# EAGLE board mach di day 1-7 (EAGLE 6.1)
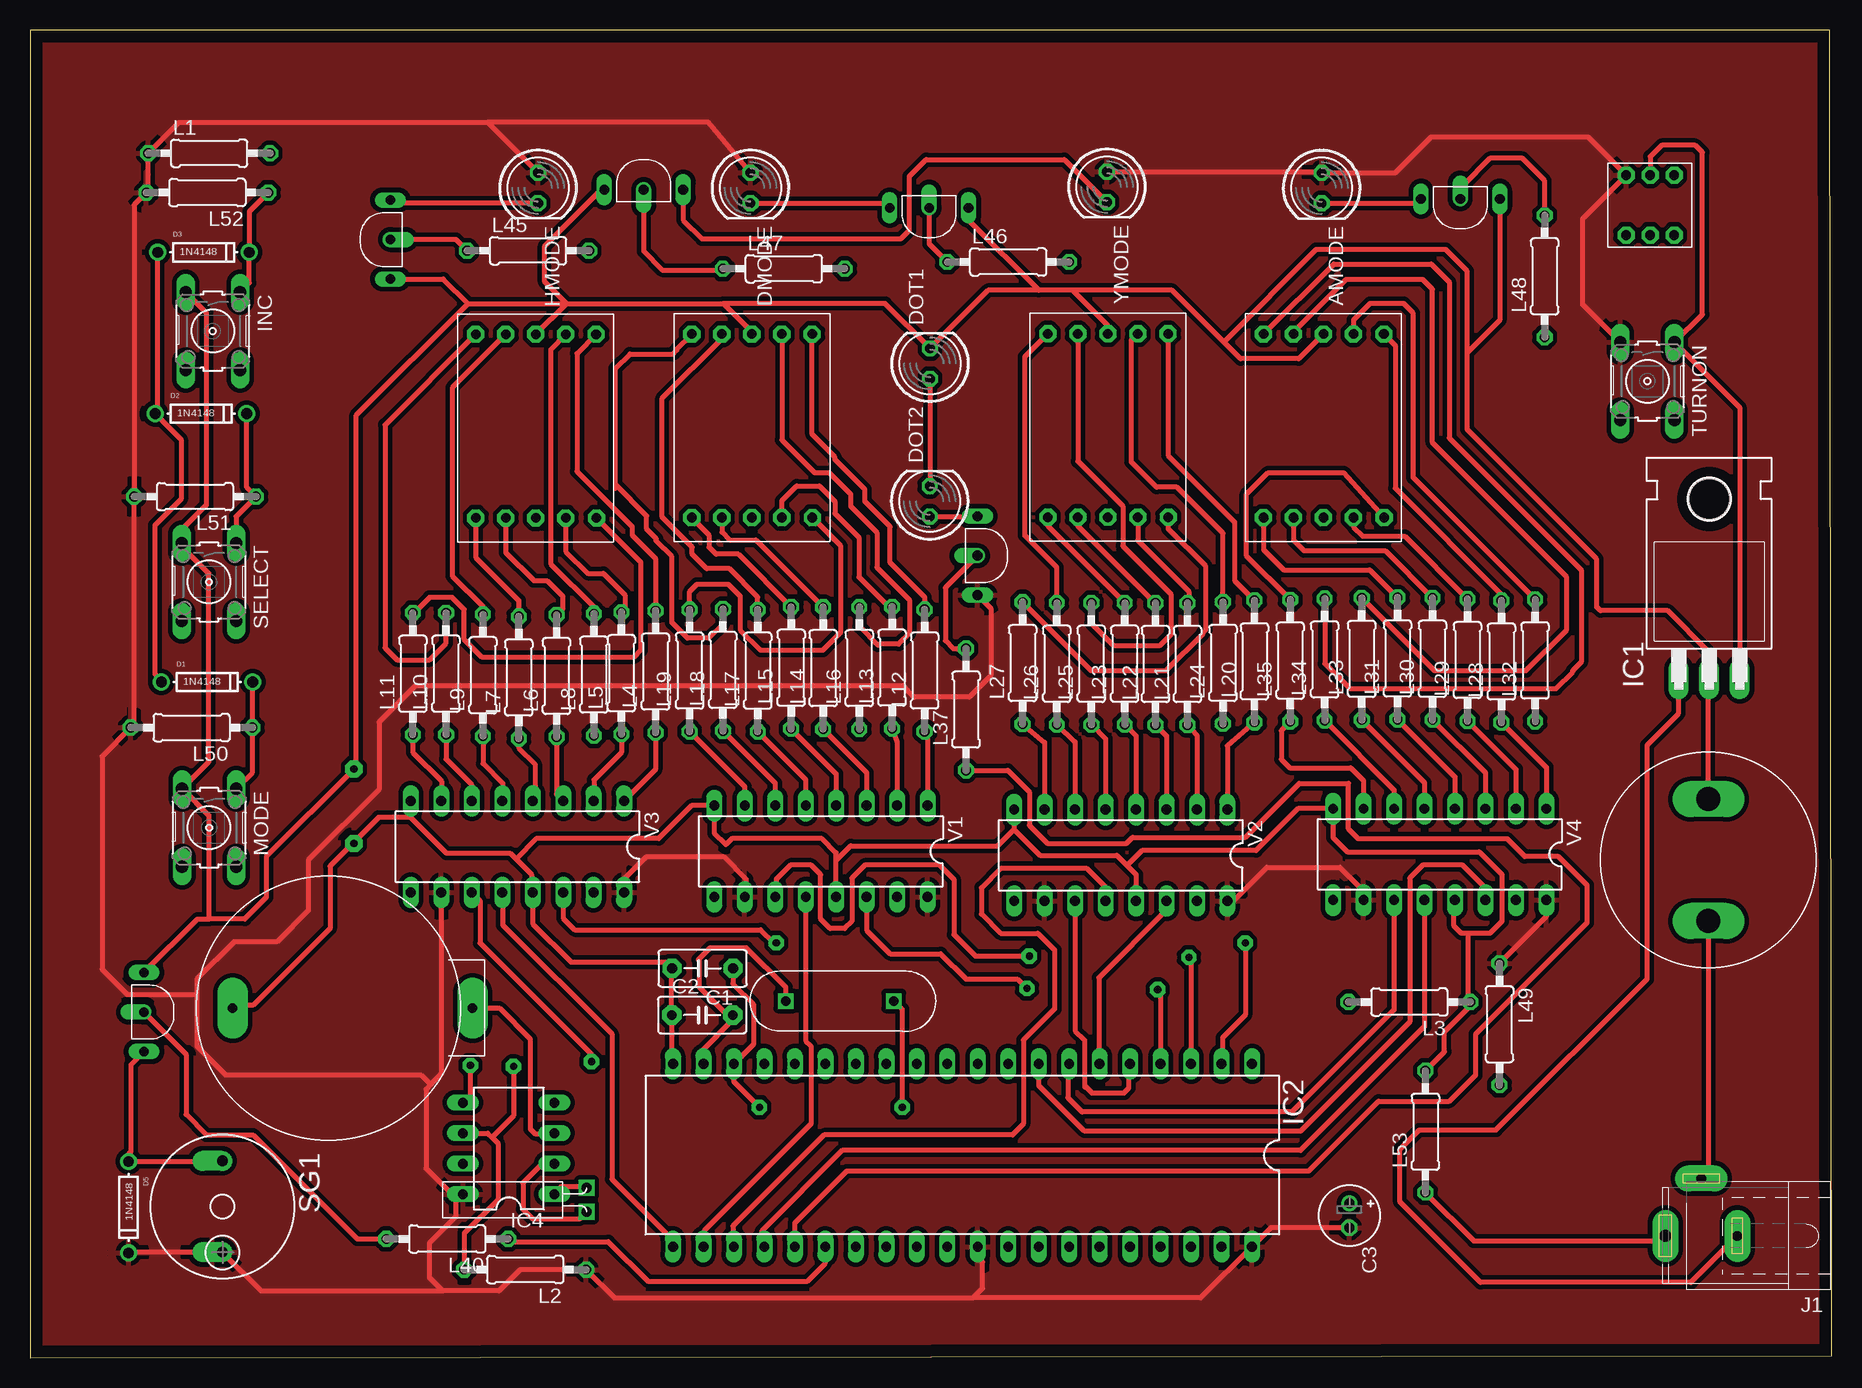
[diagram p0: board, top side]
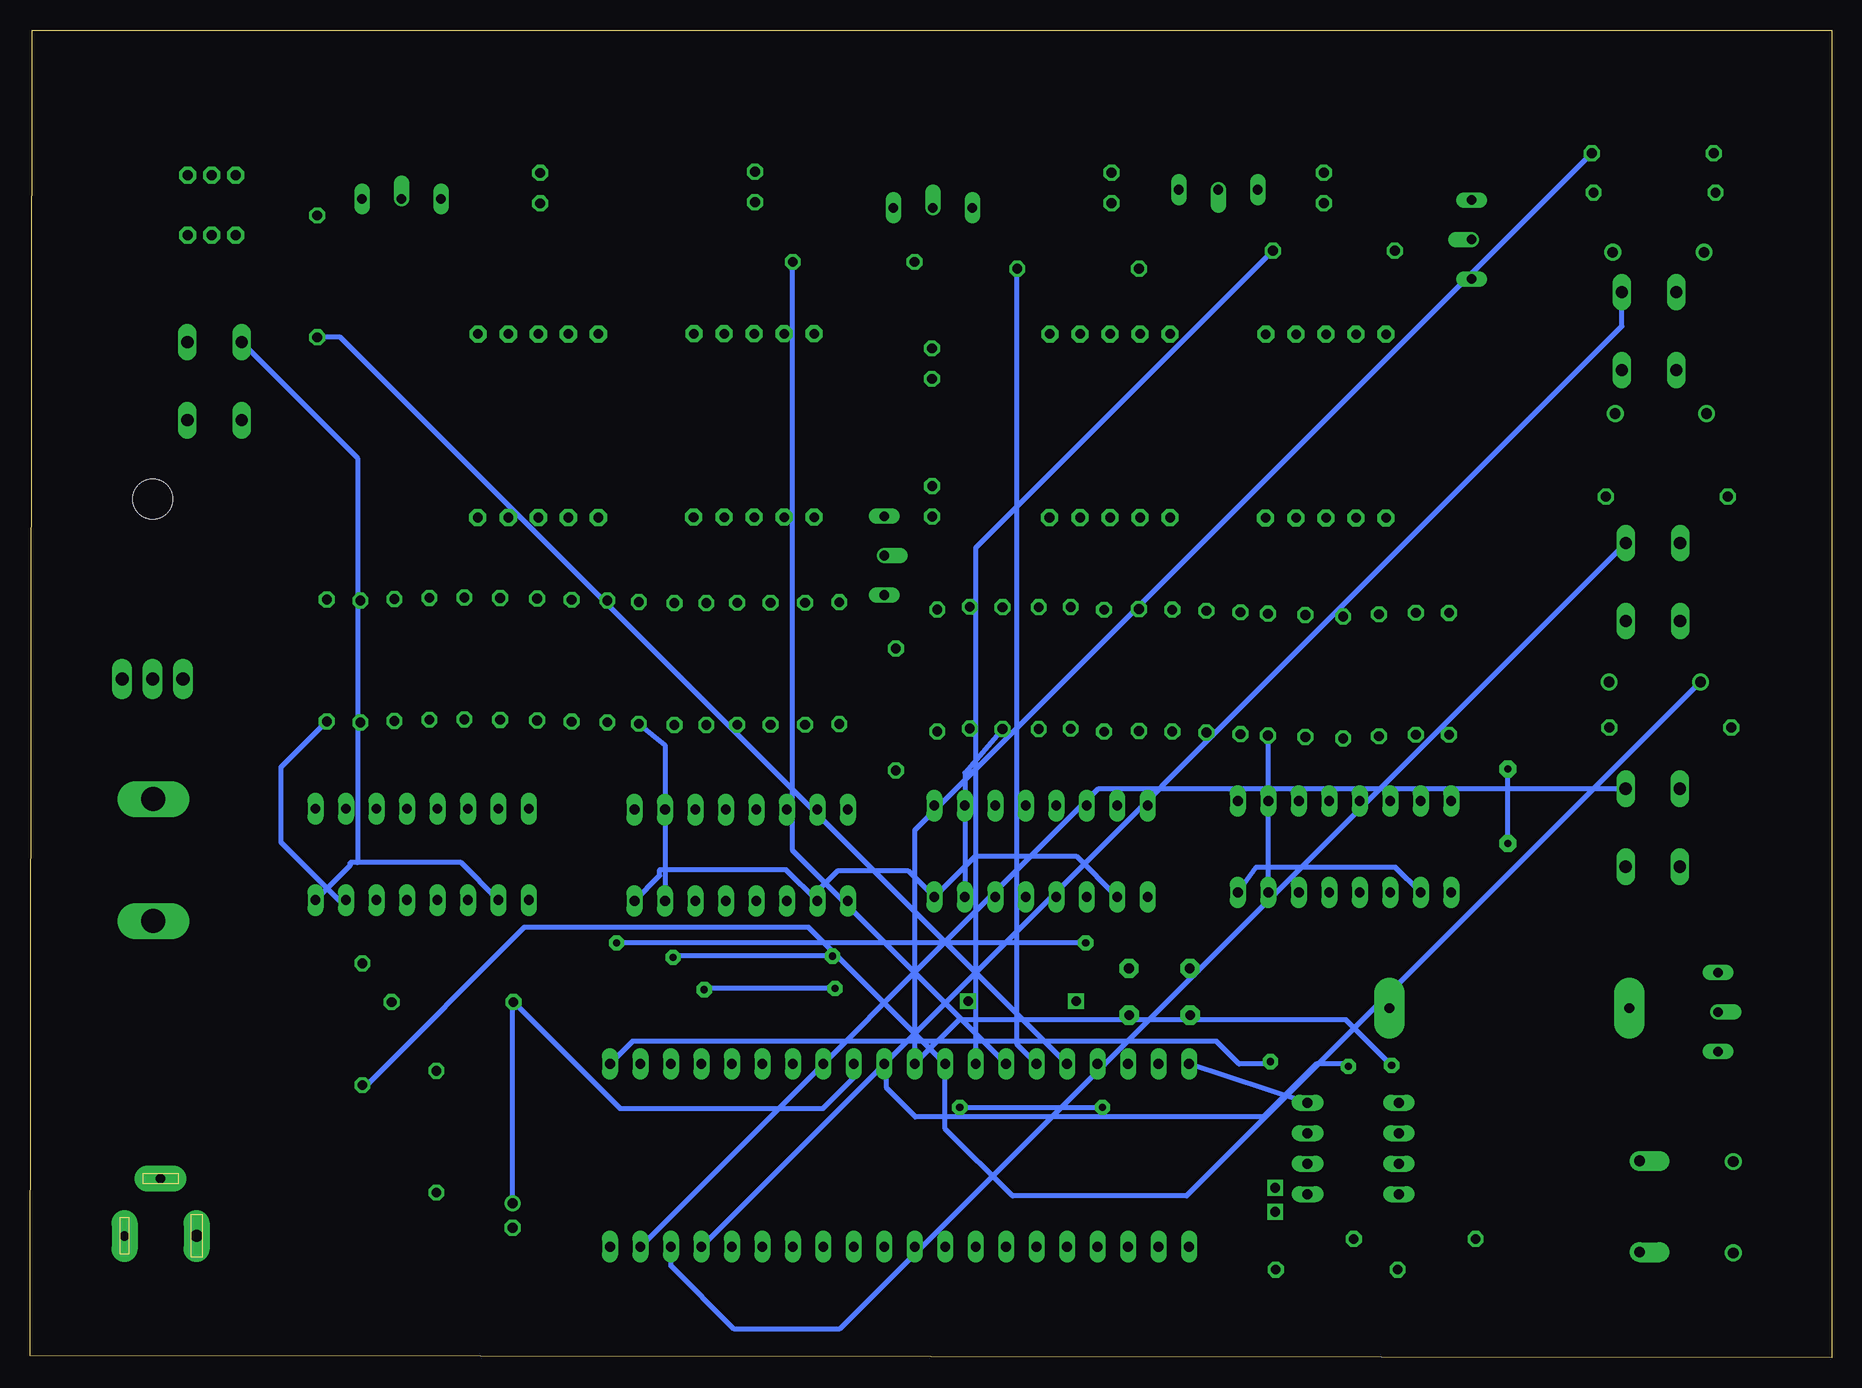
[diagram p1: board, bottom side, seen from below]

Size 150.2 x 110.71 mm. Coordinates in mm from the lower left corner, seen from the top.
Outline: 0,0 150.2,0.2 150.01,110.69 0,110.71 0,0
Copper layers (1*16): Top 0.035mm / dielectric 1.5mm / Bottom 0.035mm
Design rules: minimum track width 11mil, minimum drill 20mil, track to track 15mil, track to pad 15mil, pad to pad 15mil, via to via 15mil, smd to smd 8mil, copper to edge 40mil, drill to drill 8mil, minimum pad ring 10mil, minimum via ring 8mil, stop-mask expansion 10mil, vias tented up to drill 0mil, thermal gap 40mil

## Footprints (pad centres in the part's own frame; a part is rotated, then mirrored left to right if it is on the bottom)
7SEG13X19 = drill 0.8 pad 1.422 octagon: P$1 5.175,7.19; P$2 2.65,7.19; P$3 0.15,7.19; P$4 -2.35,7.19; P$5 -4.85,7.19; P$6 5.201,-8.11; P$7 2.65,-8.11; P$8 0.15,-8.11; P$9 -2.35,-8.11; P$10 -4.85,-8.11
LED5MM = drill 0.813 octagon: A -1.27,0; K 1.27,0
C5B3 = drill 0.813 pad 1.6 octagon: 1 -2.54,0; 2 2.54,0
E2-5 = drill 0.813 pad 1.27: + -1.016,0 | drill 0.813 pad 1.27 octagon: - 1.016,0
DO-1N4148 = drill 0.9: A -3.81,0; C 3.81,0
TO220H = drill 1.118 long: 1 -2.54,-10.16; 2 0,-10.16; 3 2.54,-10.16 | hole 3.302: 0,4.826
DIL40 = drill 0.813 long: 1 -24.13,-7.62; 2 -21.59,-7.62; 3 -19.05,-7.62; 4 -16.51,-7.62; 5 -13.97,-7.62; 6 -11.43,-7.62; 7 -8.89,-7.62; 8 -6.35,-7.62; 9 -3.81,-7.62; 10 -1.27,-7.62; 11 1.27,-7.62; 12 3.81,-7.62; 13 6.35,-7.62; 14 8.89,-7.62; 15 11.43,-7.62; 16 13.97,-7.62; 17 16.51,-7.62; 18 19.05,-7.62; 19 21.59,-7.62; 20 24.13,-7.62; 21 24.13,7.62; 22 21.59,7.62; 23 19.05,7.62; 24 16.51,7.62; 25 13.97,7.62; 26 11.43,7.62; 27 8.89,7.62; 28 6.35,7.62; 29 3.81,7.62; 30 1.27,7.62; 31 -1.27,7.62; 32 -3.81,7.62; 33 -6.35,7.62; 34 -8.89,7.62; 35 -11.43,7.62; 36 -13.97,7.62; 37 -16.51,7.62; 38 -19.05,7.62; 39 -21.59,7.62; 40 -24.13,7.62
DIL08 = drill 0.813 long: 1 -3.81,-3.81; 2 -1.27,-3.81; 3 1.27,-3.81; 4 3.81,-3.81; 5 3.81,3.81; 6 1.27,3.81; 7 -1.27,3.81; 8 -3.81,3.81
B3F-10XX = drill 1.016 long: 1 -3.251,2.261; 2 3.251,2.261; 3 -3.251,-2.261; 4 3.251,-2.261
SPC4077 = drill 0.8 pad 2.184 long: 1 -3,0; 2 0,-4.8 | drill 1 pad 2.184 long: 3 3,0
0207/10 = drill 0.813 octagon: 1 -5.08,0; 2 5.08,0
BMT1205XH7.5 = drill 0.9 pad 1.676 offset: + 3.8,0; - -3.8,0
PINCMOS3VCR23 = drill 0.8 pad 2.54 long: P$1 0,8; P$2 0,-12
XTAL32KHZMINI = drill 0.8 square: P$1 0.5,-12; P$2 2.5,-12
XTAL12MHZ = drill 0.8 square: P$1 9.5,-2.5; P$2 0.5,-2.5
PUSKLOCKBUTTON = drill 0.8 pad 1.422 octagon: P$1 5.04,0; P$2 3.04,0; P$3 1.04,0; P$4 1.04,-5; P$5 3.04,-5; P$6 5.04,-5
C9014 = drill 0.8 long: P$1 -1.04,1; P$3 5.54,1 | drill 0.8 offset: P$2 2.25,1
9VBATERYJACK = drill 2 long: P$1 -5.08,0; P$2 5.08,0
DIL16 = drill 0.813 long: 1 -8.89,-3.81; 2 -6.35,-3.81; 3 -3.81,-3.81; 4 -1.27,-3.81; 5 1.27,-3.81; 6 3.81,-3.81; 7 6.35,-3.81; 8 8.89,-3.81; 9 8.89,3.81; 10 6.35,3.81; 11 3.81,3.81; 12 1.27,3.81; 13 -1.27,3.81; 14 -3.81,3.81; 15 -6.35,3.81; 16 -8.89,3.81

## Placement (x,y rotation side)
7SEG1  7SEG13X19 common Katot  [7SEG13X19]  42.01,78.15 0 top
7SEG2  7SEG13X19 common Katot  [7SEG13X19]  60.02,78.17 0 top
7SEG3  7SEG13X19 common Katot  [7SEG13X19]  89.69,78.19 0 top
7SEG4  7SEG13X19 common Katot  [7SEG13X19]  107.68,78.17 0 top
AMODE  Blue  [LED5MM]  107.67,97.53 270 top
C1  33p  [C5B3]  56.06,32.48 180 top
C2  33p  [C5B3]  56.04,28.59 0 top
C3  10uF  [E2-5]  109.97,11.87 270 top
D1  1N4148  [DO-1N4148]  14.76,56.35 0 top
D2  1N4148  [DO-1N4148]  14.26,78.73 0 top
D3  1N4148  [DO-1N4148]  14.47,92.17 0 top
D5  1N4148  [DO-1N4148]  8.21,12.57 270 top
DMODE  Blue  [LED5MM]  60.05,97.54 270 top
DOT1  Red  [LED5MM]  75.02,82.9 90 top
DOT2  Red  [LED5MM]  75,71.42 90 top
HMODE  Blue  [LED5MM]  42.35,97.54 270 top
IC1  7805T  [TO220H]  139.97,66.77 0 top
IC2  AT89C51-12PC  [DIL40]  77.73,16.9 180 top
IC4  ds1307  [DIL08]  39.9,17.46 90 top
INC  button  [B3F-10XX]  15.24,85.61 270 top
J1  jack dc  [SPC4077]  139.31,10.17 180 top
L1  10K  [0207/10]  14.93,100.43 0 top
L2  10K  [0207/10]  41.28,7.37 180 top
L3  8k2  [0207/10]  114.98,29.67 180 top
L4  450  [0207/10]  52.14,57.22 90 top
L5  450  [0207/10]  49.3,57.09 90 top
L6  450  [0207/10]  43.89,56.86 90 top
L7  450  [0207/10]  40.75,56.72 90 top
L8  450  [0207/10]  47,56.97 90 top
L9  450  [0207/10]  37.75,56.91 90 top
L10  450  [0207/10]  34.68,57.04 90 top
L11  450  [0207/10]  31.92,57.04 90 top
L12  450  [0207/10]  74.57,57.31 90 top
L13  450  [0207/10]  71.87,57.55 90 top
L14  450  [0207/10]  66.12,57.51 90 top
L15  450  [0207/10]  63.45,57.53 90 top
L16  450  [0207/10]  69.13,57.51 90 top
L17  450  [0207/10]  60.67,57.3 90 top
L18  450  [0207/10]  57.76,57.36 90 top
L19  450  [0207/10]  54.98,57.3 90 top
L20  450  [0207/10]  102.07,58.07 90 top
L21  450  [0207/10]  96.48,57.85 90 top
L22  450  [0207/10]  93.82,57.85 90 top
L23  450  [0207/10]  91.25,57.87 90 top
L24  450  [0207/10]  99.45,57.95 90 top
L25  450  [0207/10]  88.47,57.87 90 top
L26  450  [0207/10]  85.59,57.87 90 top
L27  450  [0207/10]  82.74,57.93 90 top
L28  450  [0207/10]  122.65,58.05 90 top
L29  450  [0207/10]  119.83,58.18 90 top
L30  450  [0207/10]  116.91,58.29 90 top
L31  450  [0207/10]  113.99,58.31 90 top
L32  450  [0207/10]  125.46,58.15 90 top
L33  450  [0207/10]  111.01,58.28 90 top
L34  450  [0207/10]  107.92,58.23 90 top
L35  450  [0207/10]  105.05,58.13 90 top
L37  180K  [0207/10]  78.02,54.06 90 top
L40  220K  [0207/10]  34.78,9.92 180 top
L45  330K  [0207/10]  41.52,92.31 0 top
L46  330K  [0207/10]  81.54,91.37 0 top
L47  330K  [0207/10]  62.83,90.8 0 top
L48  330K  [0207/10]  126.26,90.17 90 top
L49  10K  [0207/10]  122.49,27.82 270 top
L50  10K  [0207/10]  13.47,52.55 180 top
L51  10K  [0207/10]  13.76,71.81 180 top
L52  10K  [0207/10]  14.79,97.15 180 top
L53  15  [0207/10]  116.32,18.86 90 top
MODE  button  [B3F-10XX]  14.93,44.21 270 top
SELECT  button  [B3F-10XX]  14.92,64.69 270 top
SG1  buzzer 5V  [BMT1205XH7.5]  16.04,12.62 270 top
TURNON  button  [B3F-10XX]  134.82,81.43 270 top
U$1  PINCMOS3VCR23  [PINCMOS3VCR23]  24.89,29.17 90 top
U$2  XTAL32KHZMINI  [XTAL32KHZMINI]  34.4,11.69 90 top
U$5  XTAL12MHZ  [XTAL12MHZ]  72.5,27.26 180 top
U$7  lock button down  [PUSKLOCKBUTTON]  132.01,98.61 0 top
U$8  C9014  [C9014]  8.5,31.09 270 top
U$9  C9014  [C9014]  77.19,96.89 180 top
U$10  C9014  [C9014]  31.04,90.99 90 top
U$11  C9014  [C9014]  48.9,96.4 0 top
U$12  C9014  [C9014]  121.48,97.63 180 top
U$13  C9014  [C9014]  77.98,69.14 270 top
U$14  9V  [9VBATERYJACK]  139.91,41.51 90 top
V1  74595N  [DIL16]  65.93,42.24 180 top
V2  74595N  [DIL16]  90.92,41.91 180 top
V3  74595N  [DIL16]  40.63,42.62 180 top
V4  74595N  [DIL16]  117.51,41.99 180 top
YMODE  Blue  [LED5MM]  89.77,97.62 270 top

## Library data of the parts
7SEG1-7SEG4 = 7seg13x19
AMODE DMODE DOT1 DOT2 HMODE YMODE = led
C1 C2 = capacitor-wima
C3 = rcl
D1-D3 D5 = microbuilder
IC1 = linear
IC2 = atmel
IC4 = ic-package
INC MODE SELECT TURNON = switch-omron
J1 = con-jack
L1-L35 L37 L40 L45-L53 = resistor
SG1 = buzzer
U$1 = PINCMOS3VCR23
U$2 = Xtal32khzmini
U$5 = xtal12mhz
U$7 = pushlockbutton
U$8-U$13 = C9014
U$14 = 9vbateryjack
V1-V4 = 74ttl-din

## Nets
GND: 7SEG1.P$3 7SEG2.P$3 7SEG3.P$3 7SEG4.P$3 C1.2 C2.1 DOT1.K IC1.2 IC2.20 IC4.4 INC.3 L3.1 L53.2 MODE.3 SELECT.3 U$1.P$1 U$8.P$1 U$9.P$1 U$10.P$1 U$11.P$1 U$12.P$1 U$14.P$2 V1.8 V1.13 V2.8 V2.13 V3.8 V3.13 V4.8 V4.13
N$1: IC2.11 IC4.5 L1.2
N$2: IC2.10 IC4.6 L2.2
N$3: IC4.1 U$2.P$2
N$4: C3.+ IC2.9 L3.2
N$5: IC4.3 U$1.P$2
N$6: IC4.2 U$2.P$1
N$7: C2.2 IC2.19 U$5.P$1
N$8: C1.1 IC2.18 U$5.P$2
N$9: D1.C IC2.39 L50.1 MODE.1
N$10: IC2.25 L37.1
N$11: IC2.1 V3.11
N$12: IC2.2 V3.14
N$13: IC2.3 V1.11
N$14: DOT2.A U$13.P$1
N$15: IC2.5 V2.11
N$16: 7SEG1.P$4 L9.2
N$17: IC2.6 V2.14
N$18: IC2.7 V4.11
N$19: IC2.8 V4.14
N$20: L4.1 V3.1
N$21: L8.1 V3.15
N$22: 7SEG1.P$10 L7.2
N$23: L9.1 V3.5
N$24: L10.1 V3.6
N$25: 7SEG1.P$1 L4.2
N$26: L11.1 V3.7
N$27: L6.1 V3.3
N$28: L7.1 V3.4
N$29: L5.1 V3.2
N$30: DOT1.A DOT2.K
N$32: 7SEG1.P$5 L10.2
N$33: IC2.4 V1.14
N$34: 7SEG1.P$6 L11.2
N$35: IC1.1 J1.1
N$36: 7SEG2.P$10 L15.2
N$37: L13.1 V1.2
N$38: L14.1 V1.3
N$39: L15.1 V1.4
N$41: L17.1 V1.5
N$42: 7SEG2.P$5 L18.2
N$43: L18.1 V1.6
N$44: L16.1 V1.15
N$45: 7SEG2.P$2 L16.2
N$47: 7SEG2.P$7 L13.2
N$48: 7SEG2.P$9 L14.2
N$51: 7SEG2.P$6 L19.2
N$53: L37.2 U$13.P$2
N$54: 7SEG3.P$10 L23.2
N$55: L27.1 V2.7
N$56: L25.1 V2.5
N$57: L26.1 V2.6
N$58: 7SEG3.P$6 L27.2
N$59: L23.1 V2.4
N$60: L21.1 V2.2
N$61: L20.1 V2.1
N$62: L24.1 V2.15
N$63: 7SEG3.P$2 L24.2
N$64: 7SEG3.P$1 L20.2
N$65: 7SEG3.P$7 L21.2
N$66: 7SEG3.P$9 L22.2
N$67: 7SEG3.P$4 L25.2
N$68: 7SEG3.P$5 L26.2
N$69: L22.1 V2.3
N$70: 7SEG4.P$10 L31.2
N$71: L35.1 V4.7
N$72: L33.1 V4.5
N$73: L34.1 V4.6
N$74: L30.1 V4.3
N$75: L31.1 V4.4
N$76: L29.1 V4.2
N$77: L28.1 V4.1
N$78: L32.1 V4.15
N$79: 7SEG4.P$2 L32.2
N$80: 7SEG4.P$1 L28.2
N$81: 7SEG4.P$7 L29.2
N$82: 7SEG4.P$9 L30.2
N$83: 7SEG4.P$4 L33.2
N$84: 7SEG4.P$5 L34.2
N$85: 7SEG4.P$6 L35.2
N$89: IC2.26 L40.1
N$90: L40.2 U$8.P$2
N$91: L45.1 U$10.P$2
N$92: L46.1 U$9.P$2
N$93: L47.1 U$11.P$2
N$94: HMODE.K U$10.P$3
N$95: D5.A SG1.- U$8.P$3
N$96: D3.C IC2.37 INC.1 L52.1
N$97: L48.2 U$12.P$2
N$98: AMODE.K U$12.P$3
N$99: U$11.P$3 YMODE.K
N$101: DMODE.K U$9.P$3
N$105: IC2.13 L45.2
N$106: D1.A D2.A D3.A IC2.12 L49.2
N$107: IC2.14 L46.2
N$108: IC2.15 L47.2
N$109: IC2.16 L48.1
N$110: IC2.21 V3.12
N$111: IC2.22 V1.12
N$112: IC2.23 V2.12
N$113: IC2.24 V4.12
N$115: J1.3 L53.1
N$117: D2.C IC2.38 L51.1 SELECT.1
N$118: J1.2 U$14.P$1
N$120: 7SEG1.P$2 L8.2
N$121: 7SEG1.P$9 L6.2
N$123: 7SEG2.P$4 L17.2
N$124: 7SEG1.P$7 L5.2
N$127: L19.1 V1.7
N$128: L12.1 V1.1
N$129: 7SEG2.P$1 L12.2
VCC: AMODE.A C3.- D5.C DMODE.A HMODE.A IC2.31 IC2.40 IC4.8 L1.1 L2.1 L49.1 L50.2 L51.2 L52.2 SG1.+ TURNON.3 U$7.P$3 U$13.P$3 V1.10 V1.16 V2.10 V2.16 V3.10 V3.16 V4.10 V4.16 YMODE.A
VCCOUT: IC1.3 TURNON.1 U$7.P$2

## Tracks (layer width: path | path; a pad name or v marks a point on that pad's centre or on a via)
GND  (via drill 0.6 pad 1.42)
  Top 0.406: V2.8 82.03,44.07 | 82.03,44.07 84.2,41.9 90.6,41.9 91.45,41.05 | 91.45,41.05 92.2,40.3 V2.13 | 91.45,41.05 92.7,42.3 102.2,42.3 105.7,45.8 V4.8 108.62,43.38 109.8,42.2 120.8,42.2 122.7,40.3 122.7,36.4 121.7,35.4 119.9,35.4 | 119.9,35.4 119.3,35.4 118.7,36 118.7,38.1 V4.13 | V3.8 31.74,45.06 | 31.74,45.06 34.7,42.1 40,42.1 40.5,41.6 | 40.5,41.6 41.8,40.3 41.8,38.91 V3.13 41.9,36.2 45.1,33 53,33 C1.2 53.5,32.45 C2.1 53.5,24.61 IC2.20 | 40.5,41.6 42.2,43.3 52.4,43.3 55.15,46.05 V1.8 57.04,43.76 58,42.8 58.5,43.3 66,43.3 67.2,42.1 67.2,41.5 | V1.13 67.2,41.5 | 67.2,41.5 68.4,42.7 80.66,42.7 82.03,44.07 | 31.74,45.06 29.06,45.06 27,43 | 27,43 25,41 25,35.8 18.6,29.4 17.12,29.4 U$1.P$1 | 7SEG1.P$3 44.73,87.9 | 44.73,87.9 57.8,87.9 | 7SEG2.P$3 60.17,85.53 57.8,87.9 | 57.8,87.9 71.29,87.9 DOT1.K 79.86,89 84.1,89 | 7SEG3.P$3 89.84,86.06 86.9,89 | 86.9,89 84.1,89 | 7SEG4.P$3 105.77,83.3 100.9,83.3 99.5,84.7 | 99.5,84.7 95.2,89 86.9,89 | 119.8,83.8 119.8,77.4 130.6,66.6 130.6,62.6 130.9,62.3 136.5,62.3 139.97,58.83 IC1.2 139.91,56.55 U$14.P$2 | 119.8,83.8 119.8,90.6 118,92.4 107.2,92.4 99.5,84.7 | U$8.P$1 13.97,36.6 14.9,36.6 | 36.5,87.9 27.2,78.6 27.2,49.3 v27,49.1 19.7,41.8 19.7,38.4 17.9,36.6 14.9,36.6 | 36.5,87.9 44.73,87.9 | L53.2 117.9,25.53 117.9,27.2 120.06,29.36 L3.1 119.9,29.83 119.9,35.4 | INC.3 14.7,87.14 14.7,71.1 12.66,69.06 SELECT.3 12.66,67.64 14.9,65.4 14.9,49.69 MODE.3 14.9,45.23 14.9,36.6 | 27,43 v27,42.9 | U$10.P$1 34.45,89.95 36.5,87.9 | 44.73,87.9 42.9,89.73 42.9,92.7 47.6,97.4 U$11.P$1 | U$9.P$1 78.23,94.87 84.1,89 | U$12.P$1 122.52,86.52 119.8,83.8
  Bottom 0.406: IC4.4 IC2.20 | v27,42.9 v27,49.1
N$1  (via drill 0.6 pad 1.27)
  Top 0.406: v36.7,24.4 36.7,21.88 IC4.5
  Bottom 0.406: v36.7,24.4 40.5,28.2 72.77,28.2 IC2.11 76.46,43.99 L1.2
N$2  (via drill 0.6 pad 1.27)
  Top 0.406: IC4.6 38.17,18.73 38.5,18.4 | 38.5,18.4 39,17.9 39,13.2 36.2,10.4 L2.2 | v40.3,24.3 40.3,20.2 38.5,18.4
  Bottom 0.406: v40.3,24.3 40.52,24.52 42.98,24.52 47.4,20.1 76.4,20.1 78.8,22.5 78.8,24.32 IC2.10
N$3
  Top 0.406: IC4.1 43.71,13.71 44.3,14.3 46.28,14.3 U$2.P$2
N$4
  Bottom 0.406: IC2.9 81.54,23.37 84.1,20.8 101.03,20.8 L3.2 109.97,29.61 C3.+
N$5
  Top 0.406: U$1.P$2 39.13,29.17 41.7,26.6 41.7,19.1 42.1,18.7 43.68,18.7 IC4.3
N$6
  Top 0.406: IC4.2 42.69,16.19 41.1,14.6 41.1,12.4 41.9,11.6 45.81,11.6 U$2.P$1
N$7
  Top 0.406: IC2.19 56,24.65 56,25.6 58.58,28.18 C2.2 58.11,28.59 55.8,30.9 55.8,33.1 55.7,33.2 56.7,34.2 59.7,34.2 63,30.9 U$5.P$1
N$8  (via drill 0.6 pad 1.27)
  Top 0.406: C1.1 58.6,31.2 60.3,29.5 60.3,26.14 IC2.18 58.68,23.03 v60.8,20.9 | U$5.P$2 72.7,29.06 v72.7,20.9
  Bottom 0.406: v72.7,20.9 v60.8,20.9
N$9
  Top 0.406: MODE.1 18.55,48.81 L50.1 18.57,52.58 D1.C
  Bottom 0.406: IC2.39 61.14,47.46 MODE.1
N$10
  Top 0.406: IC2.25 63.76,11.25 68.1,15.6 106.6,15.6 112.4,21.4 118.3,21.4 120.5,23.6 120.5,27 129.8,36.3 129.8,39.4 127.4,41.8 124.6,41.8 123.1,43.3 110.7,43.3 109.9,44.1 109.9,47.9 105.8,47.9 101.3,43.4 91.9,43.4 91.4,42.9 84.8,42.9 83.3,44.4 83.3,47.2 81.52,48.98 L37.1
N$11  (via drill 0.6 pad 1.27)
  Top 0.406: V3.11 37.5,38.13 37.5,34.6 46.8,25.3 v46.8,24.7
  Bottom 0.406: v46.8,24.7 46.98,24.52 49.42,24.52 51.3,26.4 99.97,26.4 IC2.1
N$12  (via drill 0.6 pad 1.27)
  Top 0.406: V3.14 44.44,36.66 45.4,35.7 60.9,35.7 62,34.6 v62.2,34.6 62.1,34.7 | v101.3,34.6 101.3,28.6 99.4,26.7 99.4,24.6 IC2.2
  Bottom 0.406: v62.2,34.6 v101.3,34.6
N$13  (via drill 0.6 pad 1.27)
  Top 0.406: 83.4,33.5 v83.3,33.5 78.8,33.5 77,35.3 77,39.9 75.8,41.1 69.6,41.1 68.5,40 68.5,36.4 67.9,35.8 66.7,35.8 65.9,36.6 65.9,40.3 65.1,41.1 63.4,41.1 62.2,39.9 62.2,38.52 V1.11 | v96.6,33.4 96.78,33.4 IC2.3
  Bottom 0.406: v83.3,33.5 96.6,33.5 v96.6,33.4
N$14
  Top 0.406: DOT2.A 78.95,70.14 U$13.P$1
N$15
  Top 0.406: V2.11 87.11,27.29 87.9,26.5 87.9,22.6 88,22.6 88.5,22.1 91.2,22.1 91.6,22.5 91.6,24.42 IC2.5
N$16
  Top 0.406: 7SEG1.P$4 35.2,80.87 35.2,65.2 37.75,62.65 L9.2
N$17
  Top 0.406: IC2.6 89.1,24.57 89.1,31.7 94.73,37.33 V2.14
N$18
  Top 0.406: V4.11 113.7,29 105.2,20.5 87.7,20.5 86.5,21.7 86.5,24.4 IC2.7
N$19
  Top 0.406: V4.14 121.32,39.18 119.4,41.1 116.1,41.1 115,40 115,28 105.9,18.9 87.9,18.9 84.1,22.7 84.1,24.49 IC2.8
N$20
  Top 0.406: L4.1 52.14,49.05 V3.1
N$21
  Bottom 0.406: L8.1 47,38.83 V3.15
N$22
  Top 0.406: 7SEG1.P$10 37.16,66.74 40.75,63.15 L7.2
N$23
  Top 0.406: L9.1 37.75,49.55 39.4,47.9 39.4,46.47 V3.5
N$24
  Top 0.406: L10.1 34.68,49.92 36.8,47.8 36.8,46.45 V3.6
N$25
  Top 0.406: 7SEG1.P$1 45.6,83.75 45.6,73.9 50.2,69.3 50.2,68.6 52.14,66.66 L4.2
N$26
  Top 0.406: L11.1 31.92,50.48 34.3,48.1 34.3,46.45 V3.7
N$27
  Top 0.406: L6.1 43.89,46.98 V3.3
N$28
  Top 0.406: L7.1 40.75,50.85 42.1,49.5 42.1,46.63 V3.4
N$29
  Top 0.406: L5.1 49.3,50.5 47,48.2 47,46.45 V3.2
N$30
  Top 0.406: DOT1.A 75.02,72.71 DOT2.K
N$31
  pour Top: 6.72,104.99 150.21,104.99 150.21,0.19 6.72,0.19
N$32
  Top 0.406: 7SEG1.P$5 29.6,77.77 29.6,59.2 30.6,58.2 33.3,58.2 34.68,59.58 L10.2
N$33  (via drill 0.6 pad 1.27)
  Top 0.406: v94,30.7 94.24,30.46 IC2.4 | V1.14 69.74,35.66 71.7,33.7 75.9,33.7 78,31.6 82.3,31.6 v83.1,30.8
  Bottom 0.406: v83.1,30.8 93.9,30.8 v94,30.7
N$34
  Top 0.406: 7SEG1.P$6 50.9,66.35 50.9,59 50.3,58.4 37.7,58.4 36.2,59.9 36.2,62.4 35.2,63.4 33.3,63.4 32.02,62.12 L11.2
N$35
  Top 0.406: IC1.1 137.43,53.73 134.8,51.1 134.8,31.6 122.2,19 115.8,19 114.2,17.4 114.2,13 120.9,6.3 138.45,6.3 J1.1
N$36
  Top 0.406: L15.2 59.06,67 57.2,67 56.6,67.6 56.6,68.6 55.17,70.03 7SEG2.P$10
N$37
  Top 0.406: L13.1 72.28,51.36 V1.2
N$38
  Top 0.406: L14.1 69.74,48.81 V1.3
N$39
  Top 0.406: L15.1 67.2,48.7 V1.4
N$41
  Top 0.406: L17.1 64.66,48.22 V1.5
N$42
  Top 0.406: L18.2 57.76,61.16 56.6,60 54.8,60 53.5,61.3 53.5,66.8 52.2,68.1 52.2,68.3 51.4,69.1 51.4,70.2 48.8,72.8 | 7SEG2.P$5 53.9,84.09 53.9,84 53.6,83.7 50,83.7 48.8,82.5 48.8,72.8 | 48.8,72.5 48.8,72.8
N$43
  Top 0.406: L18.1 62.12,47.92 V1.6
N$44
  Bottom 0.406: L16.1 72.28,48.78 V1.15
N$45
  Top 0.406: L16.2 69.13,60.97 70.7,59.4 70.8,59.5 72.4,59.5 73.3,60.4 73.3,63.2 70.6,65.9 70.6,68.8 68.4,71 68.4,72 66.6,73.8 65.4,73.8 62.67,76.53 7SEG2.P$2
N$47
  Top 0.406: 7SEG2.P$7 62.67,71.47 63.9,72.7 65.8,72.7 67.1,71.4 67.1,70.4 69.1,68.4 69.1,65.1 71.57,62.63 L13.2
N$48
  Top 0.406: 7SEG2.P$9 57.67,68.83 58.3,68.2 60.51,68.2 L14.2
N$51
  Top 0.406: L19.2 54.98,63.88 55.6,64.5 58.2,64.5 59.2,63.5 59.2,60.7 60.9,59 66.1,59 67.6,60.5 67.6,67.68 7SEG2.P$6
N$53
  Top 0.406: U$13.P$2 76.3,64.21 76.3,59.8 76.96,59.14 L37.2
N$54
  Top 0.406: 7SEG3.P$10 84.84,69.37 L23.2
N$55
  Top 0.406: L27.1 84.57,51.32 V2.7
N$56
  Top 0.406: L25.1 89.65,51.61 V2.5
N$57
  Top 0.406: L26.1 87.11,51.37 V2.6
N$58
  Top 0.406: L27.2 88.45,57.3 94.7,57.3 97.8,60.4 97.8,60.5 98,60.7 98,66 94.89,69.11 7SEG3.P$6
N$59
  Top 0.406: L23.1 92.19,51.85 V2.4
N$60
  Top 0.406: L21.1 97.27,51.88 V2.2
N$61
  Top 0.406: L20.1 99.81,51.03 V2.1
N$62
  Bottom 0.406: L24.1 97.27,51.09 V2.15
N$63
  Top 0.406: L24.2 99.45,68.75 95.6,72.6 93.9,72.6 91.8,74.7 91.8,84.85 7SEG3.P$2
N$64
  Top 0.406: 7SEG3.P$1 94.86,75.24 100.4,69.7 100.4,64.82 L20.2
N$65
  Top 0.406: 7SEG3.P$7 92.34,68.16 96.6,63.9 96.6,63.05 L21.2
N$66
  Top 0.406: 7SEG3.P$9 87.34,69.36 93.77,62.93 L22.2
N$67
  Top 0.406: L25.2 88.47,61.23 90.3,59.4 94.2,59.4 95.2,60.4 95.1,60.5 95.1,63.7 91.1,67.7 91.1,71 87.34,74.76 7SEG3.P$4
N$68
  Top 0.406: L26.2 85.59,65.91 82.9,68.6 82.9,83.45 7SEG3.P$5
N$69
  Top 0.406: L22.1 94.73,51.86 V2.3
N$70
  Top 0.406: 7SEG4.P$10 102.83,67.37 104.5,65.7 111.69,65.7 L31.2
N$71
  Top 0.406: L35.1 104.3,52.3 104.3,49.9 105,49.2 110.1,49.2 111.16,48.14 V4.7
N$72
  Top 0.406: L33.1 116.24,47.97 V4.5
N$73
  Top 0.406: L34.1 113.7,47.37 V4.6
N$74
  Top 0.406: L30.1 121.32,48.8 V4.3
N$75
  Top 0.406: L31.1 118.78,48.45 V4.4
N$76
  Top 0.406: L29.1 123.86,49.07 V4.2
N$77
  Top 0.406: L28.1 126.4,49.23 V4.1
N$78
  Bottom 0.406: L32.1 129.3,49.23 129.3,43 124.48,38.18 V4.15
N$79
  Top 0.406: L32.2 115.3,73.39 115.3,87.1 114.5,87.9 111.7,87.9 110.33,86.53 7SEG4.P$2
N$80
  Top 0.406: 7SEG4.P$1 113.8,84.41 113.8,72.5 122.65,63.65 L28.2
N$81
  Top 0.406: 7SEG4.P$7 110.33,69.27 111.1,68.5 114.59,68.5 L29.2
N$82
  Top 0.406: 7SEG4.P$9 105.33,68.17 106.2,67.3 112.98,67.3 L30.2
N$83
  Top 0.406: L33.2 117.07,57.3 124.7,57.3 128.1,60.7 128.1,65.1 116.9,76.3 116.9,89.1 116.1,89.9 109.7,89.9 105.33,85.53 7SEG4.P$4
N$84
  Top 0.406: L34.2 107.92,57.88 110,55.8 127.2,55.8 128.6,57.2 128.6,57.3 129.3,58 129.3,65.7 118.3,76.7 118.3,89.7 116.8,91.2 108.67,91.2 7SEG4.P$5
N$85
  Top 0.406: L35.2 101.4,66.86 101.4,72 103.2,73.8 109.5,73.8 7SEG4.P$6
N$89
  Top 0.406: L40.1 40.08,9.7 48.2,9.7 51.5,6.4 64.8,6.4 66.3,7.89 IC2.26
N$90
  Top 0.406: U$8.P$2 13,25.33 13,20.3 14.7,18.6 18.6,18.6 27.28,9.92 L40.2
N$91
  Top 0.406: L45.1 35.51,93.24 U$10.P$2
N$92
  Top 0.406: U$9.P$2 74.94,92.89 L46.1
N$93
  Top 0.406: U$11.P$2 51.15,92.25 52.7,90.7 57.65,90.7 L47.1
N$94
  Top 0.406: HMODE.K 30.29,96.27 U$10.P$3
N$95
  Top 0.406: SG1.- 15.99,16.38 D5.A 8.21,17.01 8.4,17.2 8.4,24.45 U$8.P$3
N$96
  Top 0.406: L52.1 18.28,95.56 D3.C 18.28,89.63 INC.1
  Bottom 0.406: IC2.37 17.5,86.01 INC.1
N$97
  Top 0.406: L48.2 126.26,98.14 124.4,100 121.7,100 119.4,97.7 119.4,96.8 U$12.P$2
N$98
  Top 0.406: AMODE.K 115.56,96.26 U$12.P$3
N$99
  Top 0.406: U$11.P$3 54.44,94.86 56,93.3 72.6,93.3 73.3,94 73.3,98.5 74.7,99.9 86.23,99.9 YMODE.K
N$101
  Top 0.406: DMODE.K 71.27,96.27 U$9.P$3
N$105
  Bottom 0.406: L45.2 71.38,67.53 IC2.13
N$106
  Top 0.406: D1.A 10.95,56.45 10.4,57 10.4,69.4 12.6,71.6 12.6,76.57 D2.A 10.66,78.93 D3.A
  Bottom 0.406: D1.A 53.8,13.5 68.3,13.5 73.92,19.11 IC2.12 85.3,35.9 109,35.9 122.16,22.74 L49.2
N$107
  Bottom 0.406: IC2.14 86.62,42.3 L46.2
N$108
  Bottom 0.406: IC2.15 67.91,26.13 L47.2
N$109
  Bottom 0.406: IC2.16 124.33,85.09 L48.1
N$110
  Top 0.406: V3.12 39.4,38.77 39.4,36.1 48.5,27 48.5,14.9 53.6,9.8 IC2.21
N$111
  Top 0.406: V1.12 64.66,26.44 65.1,26 65.1,19.5 56.2,10.6 56.2,9.34 IC2.22
N$112
  Top 0.406: V2.12 89.65,39.25 88.1,40.8 80.9,40.8 79.3,39.2 79.3,37 80.9,35.4 84,35.4 85.4,34 85.4,29.1 82.8,26.5 82.8,19.5 81.9,18.6 66.2,18.6 58.6,11 58.6,9.35 IC2.23
N$113
  Top 0.406: V4.12 116.24,27.64 105.9,17.3 67.7,17.3 61,10.6 61,9.49 IC2.24
N$115
  Top 0.406: L53.1 120.34,9.77 135.91,9.77 J1.3
N$117
  Top 0.406: D2.C 18.07,72.58 L51.1 17.18,70.15 SELECT.1
  Bottom 0.406: SELECT.1 82.72,2.4 91.5,2.4 96.78,7.67 IC2.38
N$118
  Top 0.406: U$14.P$1 139.91,15.57 J1.2
N$120
  Top 0.406: 7SEG1.P$2 43.4,84.07 43.4,66.2 47,62.6 L8.2
N$121
  Top 0.406: 7SEG1.P$9 39.66,67.14 42,64.8 43.1,64.8 44.4,63.5 44.4,62.45 L6.2
N$123
  Top 0.406: L17.2 60.67,63.43 58.3,65.8 56.4,65.8 55.2,67 55.2,67.6 52.7,70.1 52.7,80 57.67,84.97 7SEG2.P$4
N$124
  Top 0.406: 7SEG1.P$7 44.66,67.24 46.5,65.4 47.8,65.4 49.6,63.6 49.6,62.47 L5.2
N$127
  Top 0.406: L19.1 59.58,47.63 V1.7
N$128
  Top 0.406: L12.1 74.82,51.58 V1.1
N$129
  Top 0.406: L12.2 74.6,62.41 74.6,63.4 71.7,66.3 71.7,69.3 69.6,71.4 69.6,72.4 67.1,74.9 67.1,75.1 65.2,77 7SEG2.P$1
VCC
  Top 0.406: V3.10 34.28,23.68 33.4,22.8 | 33.4,22.8 33,22.4 33,15.8 35.3,13.5 35.94,13.5 IC4.8 35.5,13.06 35.5,11.8 33.3,9.6 33.3,6.7 34.4,5.6 | V2.16 100.3,38.1 103.1,40.9 109.2,40.9 111.16,38.94 V4.10 | 78.6,5 48.72,5 L2.1 40.87,7.37 39.1,5.6 34.4,5.6 | 78.6,5 79.4,5.8 79.4,8 79,8.4 IC2.31 | V3.16 49.52,39.92 51.4,41.8 57.8,41.8 59.7,39.9 59.7,38.55 V1.10 | 13.9,30.3 13.9,31.6 17,34.7 20.6,34.7 23.2,37.3 23.2,41.5 29.1,47.4 29.1,53 32.1,56 72.8,56 73.7,55.1 78.3,55.1 80.1,56.9 80.1,62.48 U$13.P$3 | 13.9,30.3 13.9,26 16.3,23.6 32.6,23.6 33.4,22.8 | D5.C 8.28,8.82 SG1.+ 19.26,5.6 34.4,5.6 | L49.1 126.4,36.81 V4.16 | TURNON.3 129.4,87.84 129.4,94.95 U$7.P$3 129.86,101.8 116.8,101.8 113.8,98.8 AMODE.A 107.58,98.89 YMODE.A | 13.9,30.3 8.1,30.3 6,32.4 6,50.16 L50.2 8.68,52.84 L51.2 8.68,96.12 L52.2 9.85,97.3 L1.1 12.42,103 38.16,103 | HMODE.A 38.16,103 | 78.6,5 97.58,5 IC2.40 103.43,10.85 C3.- | DMODE.A 56.56,103 38.16,103
  Bottom 0.406: V3.10 36.37,40.9 48,40.9 V3.16 | V1.10 62.95,41.8 71.45,41.8 V1.16 76.99,40.6 82.9,40.6 84.57,38.93 V2.10 87.17,40.7 97.7,40.7 97.7,40.21 V2.16 | V4.10 114.28,41.3 122.9,41.3 | 122.9,41.3 123.5,41.3 123.5,41.07 V4.16 | TURNON.3 122.9,75.02 122.9,41.3
  pour Top (isolate 0.61): -0.01,110.71 -0.01,0.22 150.21,0.22 150.21,110.71
VCCOUT
  Top 0.406: IC1.3 142.51,79.25 TURNON.1 139.4,87 139.4,100.5 138.8,101.1 136,101.1 135.05,100.15 U$7.P$2

## Text on the board
tValues: 15.5 | 8.9